# Altium PCB ws2812_2020_breakout_mini.PcbDoc
Units mil, origin at the board's own origin, x right, y up, seen from the top; angles counter-clockwise.
Board outline 250 x 250 mil, 2 copper layers (Top Layer, Bottom Layer); 4 components, 6 nets, 12 pads, 1 vias.
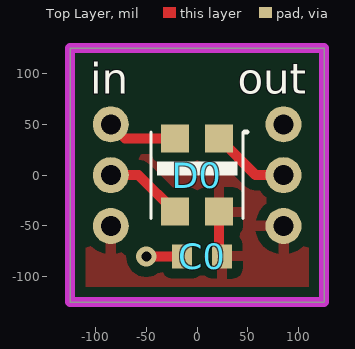
[diagram p0: Top Layer view]
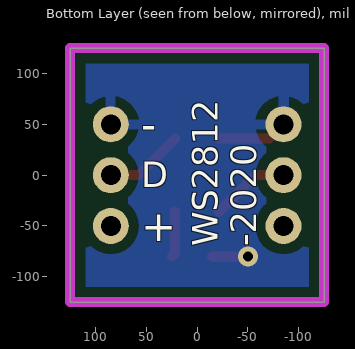
[diagram p1: Bottom Layer view, seen from below]

## Layer stack, top to bottom
Top Solder: solder mask 0.4, Solder Resist, Dk 3.5
Top Layer: signal copper 1.4
Dielectric 1: dielectric 12.6, FR-4, Dk 4.8
Bottom Layer: signal copper 1.4
Bottom Solder: solder mask 0.4, Solder Resist, Dk 3.5

## Board outline
-125,-125 -125,125 125,125 125,-125

## Design rules (kind name [scope] priority, off if disabled: settings)
Clearance [All] p1: gap=10 ignorepadtopadclearanceinfootprint=FALSE except(0: Arc-Hole Track-Hole SMDPad-Hole THPad-Hole Via-Hole Fill-Hole Poly-Hole Region-Hole Text-Hole)
MinimumSolderMaskSliver [All] p1: minsoldermaskwidth=6
PlaneConnect [All] p1: pad.planeconnectstyle=Relief pad.reliefexpansion=20 pad.reliefentries=4 pad.reliefconductorwidth=10 pad.reliefairgap=10 via.planeconnectstyle=Direct via.reliefexpansion=20 via.reliefentries=4 via.reliefconductorwidth=10 via.reliefairgap=10
PolygonConnect [All] p1: thpad.connectstyle=Relief thpad.reliefconductorwidth=10 thpad.reliefentries=4 thpad.polygonreliefangle="90 Angle" thpad.airgapwidth=10 smdpad.connectstyle=Relief smdpad.reliefconductorwidth=10 smdpad.reliefentries=4 smdpad.polygonreliefangle="90 Angle" smdpad.airgapwidth=10 via.connectstyle=Direct via.reliefconductorwidth=10 via.reliefentries=4 via.polygonreliefangle="90 Angle" via.airgapwidth=10
RoomDefinition ws2812_2020_breakout [InComponentClass('ws2812_2020_breakout')] p1: confinementstyle=ConfineIn formatcopy=TRUE lockcomponents=FALSE outline -2260,-1925 3635,-1925 3635,1850 -2260,1850
RoomDefinition ws2812_2020_breakout_mini [InComponentClass('ws2812_2020_breakout_mini')] p2: confinementstyle=ConfineIn formatcopy=TRUE lockcomponents=FALSE outline -1670,-2240 1645,-2240 1645,2135 -1670,2135
RoutingVias [All] p1: holewidth=10 width=20 viastyle="Through Hole" minholewidth=10 minwidth=20 maxholewidth=28 maxwidth=50
SilkToSolderMaskClearance [IsPad] p1: minsilkscreentomaskgap=6 clearancetoexposedcopper=TRUE
SolderMaskExpansion [All] p1: expansion=4
Width [All] p1: maxlimit=10 minlimit=10 preferedwidth=10
27 further rules are at their usual default settings.

## Classes and differential pairs
component class ws2812_2020_breakout: in out
component class ws2812_2020_breakout_mini: in out

## Components (designator, comment, footprint, x,y, rotation, side; value= is the part's Value field where it differs from the comment)
C0 "" CAP_0402R 5,-80 r0 top value=0.1uF
D0 "WS2812-2020" WS2812-2020 0,0 r90 top
in "Header 3" HDR1X3_SWD -85,-50 r90 top (schematic designator _in)
out "Header 3" HDR1X3_SWD 85,-50 r90 top (schematic designator _out)

## Footprints (in the part's own frame and the unit in brackets; to place one, negate y for a bottom-side part, rotate by r counter-clockwise, add the part's x,y. Pads: shape width x height; smd on the part's side, far side on the other; paste and mask are expansions set on the pad)
CAP_0402R [mm] "Capacitor 0402 reflow soldering"
  rect 0.5x0.6 smd: 1(-0.5,0) 2(0.5,0)
  body extent -0.5,-0.3 0.5,0.3, height 0.2
HDR1X3_SWD [mm] "Connector; Header; 1x3Position"
  round 0.9 hole 0.5 mask+0.076: 1(0,0) 2(1.27,0) 3(2.54,0)
WS2812-2020 [mm]
  rect 0.7x0.7 smd: 1(0.915,-0.55) 2(0.915,0.55) 3(-0.915,0.55) 4(-0.915,-0.55)
  silkscreen extent -1.08,-1.25 1.08,1.15, body extent -1.1,-1 1.1,1, height 0.84

## Part data
C0: library part CAP, "Capacitor"
D0: "Intelligent control LED integrated light source, low current, 2020 package", Manufacturer=Worldsemi, MPN=WS2812-2020
in out: "Header, 3-Pin"

## Via types
v1: diameter 20, hole 10, Top Layer to Bottom Layer, tented both sides, 1 vias

## Nets (pads, with @x,y where several pads share a name; then routed paths per layer and width w, separated by ;. In a path a pad name is that pad's centre, name@x,y a point inside that pad or via, vN(x,y) a via of type N, cw(c..) or ccw(c..) an arc to the next point about the centre after c; other vN are vias at no path point)
GND: C0.1 D0.2 in.3 out.3 | length 104.5
  Top Layer w10: in.3 -71.02,36.02 D0.2 ; v1(-50,-80) C0.1
Net_in_2: D0.3 in.2 | length 78.3
  Top Layer w10: in.2 -57.68,0 D0.3
Net_out_2: D0.1 out.2 | length 78.3
  Top Layer w10: D0.1 57.68,0 out.2
NetD1_1: 
NetD1_3: 
VDD: C0.2 D0.4 in.1 out.1 | length 45.2
  Top Layer w10: D0.4 21.65,-76.97 C0.2

## Polygon pours and split planes (outlines as drawn)
GND on Bottom Layer "Bottom - GND" (solid, remove dead copper, pour order 2): -125,125 125,125 125,-125 -125,-125
VDD on Top Layer "Top - VDD" (solid, remove dead copper, pour order 0): -125,125 125,125 125,-125 -125,-125

## Keep-outs
Keep-Out Layer:
  the board outline again, w10

## Silkscreen, mask and mechanical layers (free items; w line width, h text height)
Bottom Overlay:
  text "-" at 55,35 h30
  text "D" at 55,-12 h25
  text "+" at 55,-65 h30
  text "WS2812 / -2020" at -58,-70 h25 r270